# Altium PCB PCB1.PcbDoc (part 1 of 3)
Units mm, origin at the board's own origin, x right, y up, seen from the top; angles counter-clockwise.
Board outline 15.82 x 56.9 mm, 4 copper layers (Top Layer, Layer 1, Layer 2, Bottom Layer), stack 0.576 mm thick; 45 components, 31 nets, 148 pads, 202 vias.
Unrouted connection lines stored in the file: 3.
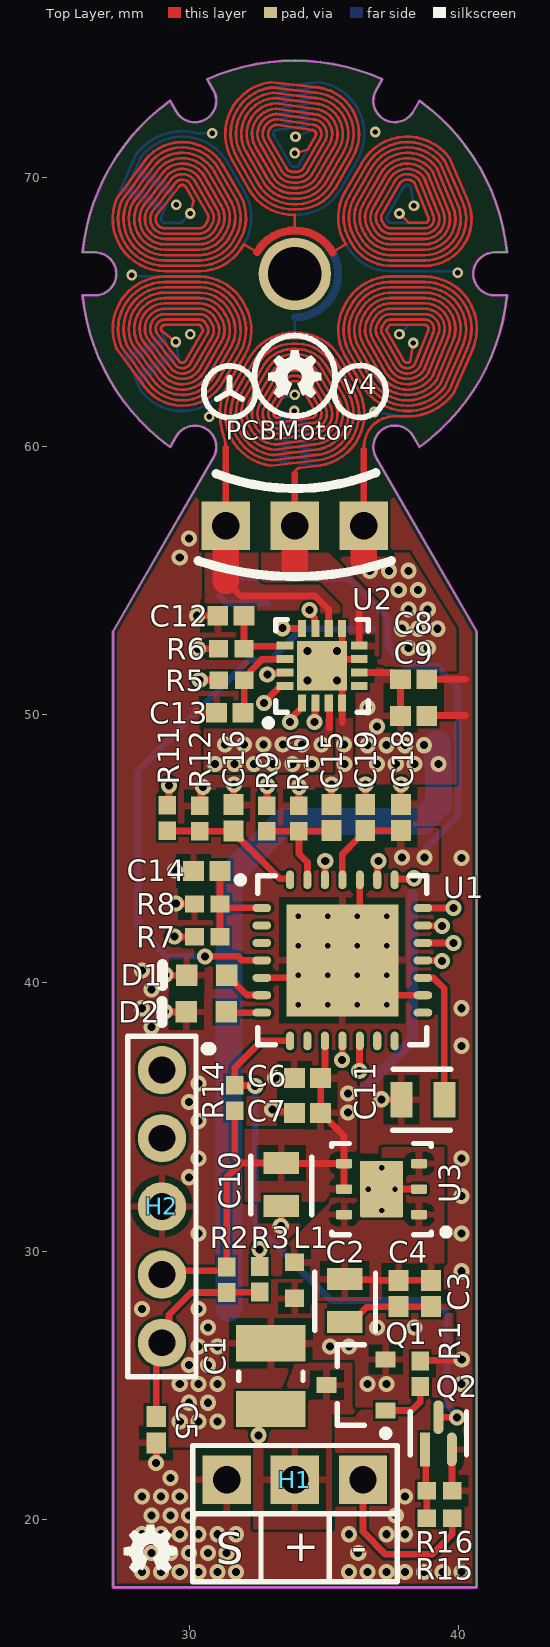
[diagram p0: Top Layer view]
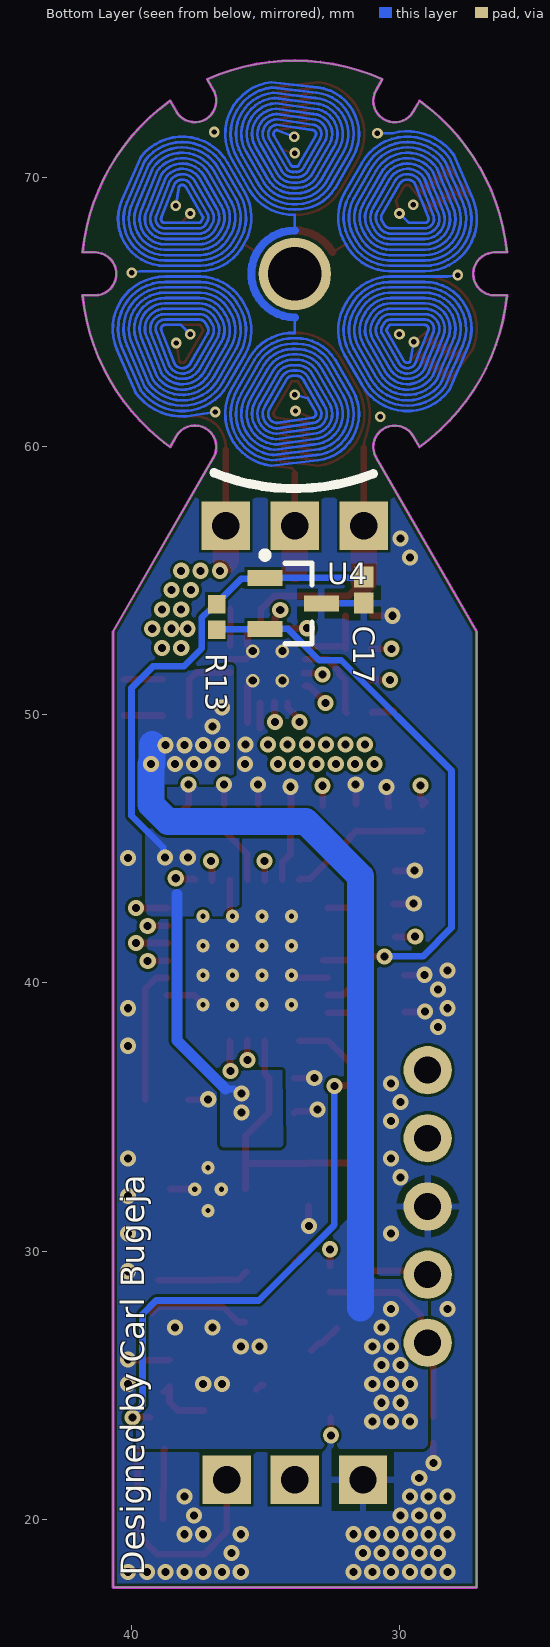
[diagram p1: Bottom Layer view, seen from below]
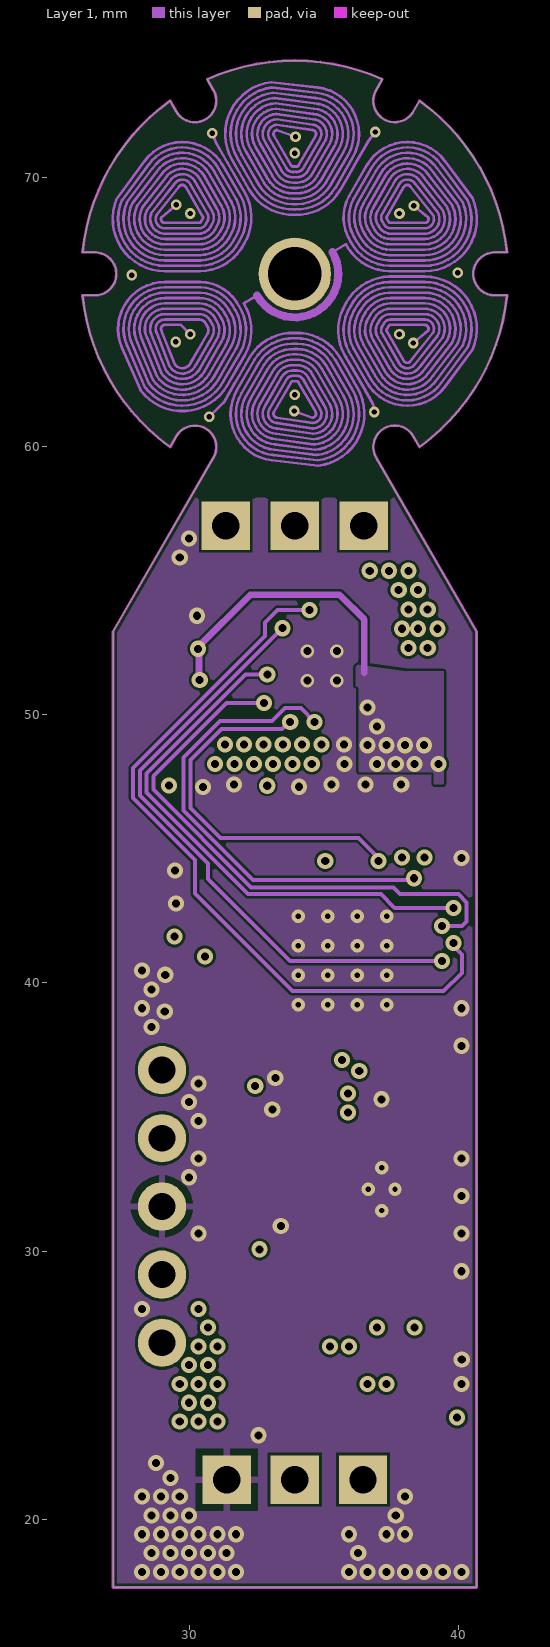
[diagram p2: Layer 1]
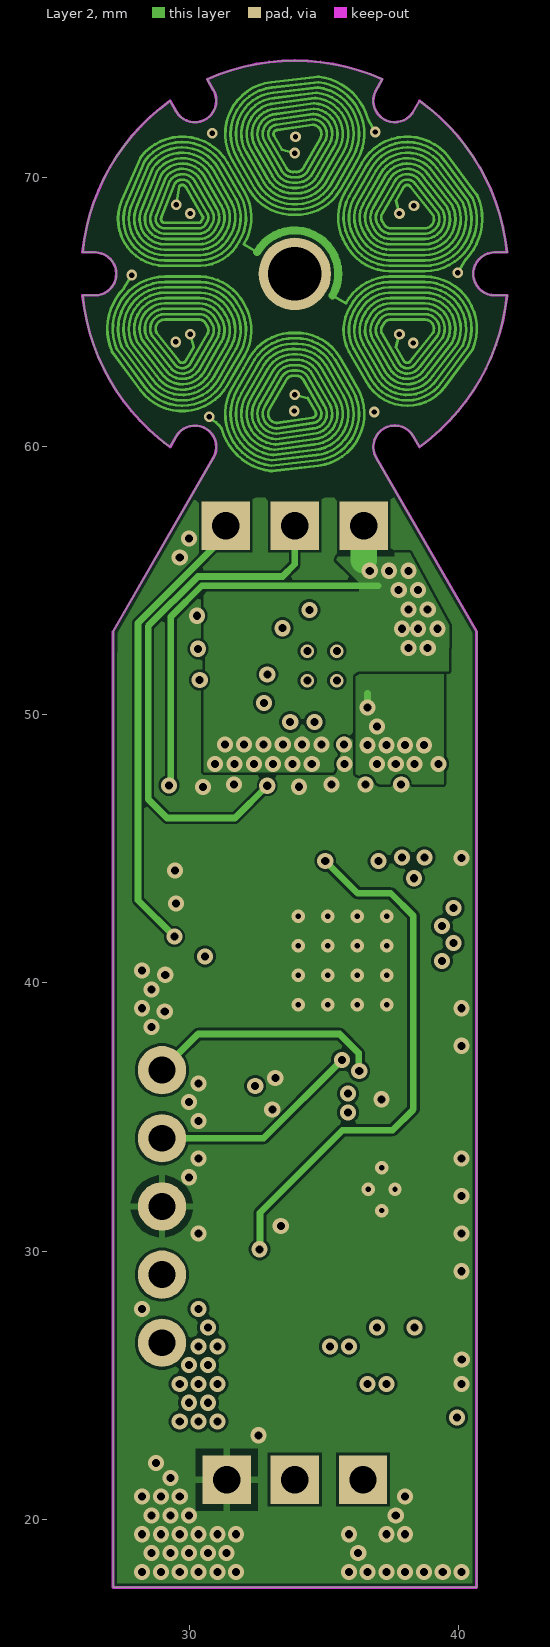
[diagram p3: Layer 2]

## Layer stack, top to bottom
Top Solder: solder mask 0.0102, Solder Resist, Dk 3.5
Top Layer: signal copper 0.0356
Dielectric 2: prepreg 0.145, PP-006, Dk 4.1
Layer 1: signal copper 0.035
Dielectric 1: dielectric 0.145, FR-4, Dk 4.8
Layer 2: signal copper 0.035
Dielectric 3: prepreg 0.145, PP-006, Dk 4.1
Bottom Layer: signal copper 0.0356
Bottom Solder: solder mask 0.0102, Solder Resist, Dk 3.5

## Board outline
27.136,17.475 27.136,53.09 30.877,59.569 ccw(c30.184,59.969) 30.984,59.969 ccw(c30.184,59.969) 29.491,60.369 29.261,59.972 cw(c33.909,66.421) 28.833,60.303 cw(c33.909,66.421) 26,65.621 26.459,65.621 ccw(c26.459,66.421) 27.259,66.421 ccw(c26.459,66.421) 26.459,67.221 26,67.221 cw(c33.909,66.421) 29.261,72.87 29.491,72.473 ccw(c30.184,72.873) 30.984,72.873 ccw(c30.184,72.873) 30.877,73.273 30.648,73.671 cw(c33.909,66.421) 37.17,73.671 36.922,73.241 ccw(c36.966,73.215) 36.917,73.229 ccw(c37.634,72.873) 38.282,72.403 ccw(c38.252,72.444) 38.296,72.419 38.557,72.87 cw(c33.909,66.421) 41.818,67.221 41.359,67.221 ccw(c41.359,66.421) 41.359,65.621 41.818,65.621 cw(c33.909,66.421) 38.985,60.303 cw(c33.909,66.421) 38.557,59.972 38.327,60.369 ccw(c37.634,59.969) 36.941,59.569 40.682,53.09 40.682,17.475

## Design rules (kind name [scope] priority, off if disabled: settings)
Clearance [All] p1: gap=0.1 ignorepadtopadclearanceinfootprint=FALSE
PolygonConnect PolygonConnect_1 [IsVia vs InNet('+3.3V')] p1: connectstyle=Direct reliefconductorwidth=0.254 reliefentries=4 polygonreliefangle="90 Angle" airgapwidth=0.254
PolygonConnect PolygonConnect_4 [IsVia vs InNet('VCC')] p2: connectstyle=Direct reliefconductorwidth=0.254 reliefentries=4 polygonreliefangle="90 Angle" airgapwidth=0.254
PolygonConnect PolygonConnect_3 [IsVia vs InNet('NetR7_2')] p3: connectstyle=Direct reliefconductorwidth=0.254 reliefentries=4 polygonreliefangle="90 Angle" airgapwidth=0.254
PolygonConnect PolygonConnect_2 [IsVia vs InNet('GND')] p4: connectstyle=Direct reliefconductorwidth=0.254 reliefentries=4 polygonreliefangle="90 Angle" airgapwidth=0.254
PolygonConnect [All] p5: connectstyle=Relief reliefconductorwidth=0.254 reliefentries=4 polygonreliefangle="90 Angle" airgapwidth=0.254
RoutingVias [All] p1: holewidth=0.2 width=0.4 viastyle="Through Hole" minholewidth=0.2 minwidth=0.4 maxholewidth=0.711 maxwidth=1.27
SolderMaskExpansion [All] p1: expansion=0 istentingtop=FALSE
Width [All] p1: maxlimit=5 minlimit=0.1 preferedwidth=0.25
30 further rules are at their usual default settings.

## Components (designator, comment, footprint, x,y, rotation, side; value= is the part's Value field where it differs from the comment)
C1 "47uF" TAYO-C1210-2_L 33.016,25.352 r90 top
C2 "10uF" FP-CL21B106KOQNNNE-MFG 35.775,28.164 r90 top
C3 "10nF" CAPC1005X56X25ML10T15 38.984,28.429 r90 top
C4 "100nF" CAPC1005X56X25ML10T15 37.77,28.429 r90 top
C5 "100nF" CAPC1005X56X25ML10T15 28.745,23.352 r90 top
C6 "100nF" CAPC1005X56X25ML10T15 34.381,36.453 r0 top
C7 "10nF" CAPC1005X56X25ML10T15 34.381,35.153 r0 top
C8 "10nF" CAPC1005X56X25ML10T15 38.336,51.316 r180 top
C9 "100nF" CAPC1005X56X25ML10T15 38.336,49.949 r180 top
C10 "10uF" FP-CL21B106KOQNNNE-MFG 33.399,32.494 r90 top
C11 "10uF" FP-CL21B106KOQNNNE-MFG 38.681,35.653 r0 top
C12 "10nF" CAPC1005X56X25ML10T15 31.528,53.683 r0 top
C13 "10nF" CAPC1005X56X25ML10T15 31.484,50.067 r0 top
C14 "10nF" CAPC1005X56X25ML10T15 30.627,44.173 r0 top
C15 "10nF" CAPC1005X56X25ML10T15 35.271,46.164 r270 top
C16 "10nF" CAPC1005X56X25ML10T15 31.627,46.155 r270 top
C17 "10nF" CAPC1005X56X25ML10T15 31.339,54.643 r90 bottom
C18 "10nF" CAPC1005X56X25ML10T15 37.861,46.164 r270 top
C19 "100nF" CAPC1005X56X25ML10T15 36.535,46.164 r270 top
D1 "HSMD-C190" AVAG-HSMX-C190_V 30.627,40.292 r180 top
D2 "HSMD-C190" AVAG-HSMX-C190_V 30.61,38.919 r180 top
H1 "H3P2.54" H3P2.54 49.235,21.096 r0 top
H2 "H5P2.54" H5P2.54* 28.959,36.753 r270 top
L1 "BLM18AG331SN1D" MURA-BLM18-RF-H4-CHIP-2_V 33.899,28.919 r90 top
Q1 "BSS308PE" INF-PG-SOT23_L 36.195,25.019 r180 top
Q2 "DMG1013T-7" FP-SOT523-IPC_B 39.259,23.219 r90 top
R1 "RC0402FR-07150RL" RESC1005X40X25ML05T10 38.581,25.438 r90 top
R2 "10k" RESC1005X40X25ML5T10 31.369,28.941 r90 top
R3 "150" RESC1005X40X25ML05T10 32.599,28.964 r270 top
R5 "10k" RESC1005X40X25ML5T10 31.549,51.285 r180 top
R6 "10k" RESC1005X40X25ML5T10 31.542,52.451 r180 top
R7 "18k" RESC1005X40X25ML05T10 30.643,41.714 r180 top
R8 "10k" RESC1005X40X25ML5T10 30.649,42.942 r0 top
R9 "18k" RESC1005X40X25ML05T10 32.87,46.128 r90 top
R10 "10k" RESC1005X40X25ML5T10 34.053,46.128 r270 top
R11 "18k" RESC1005X40X25ML05T10 29.149,46.15 r90 top
R12 "10k" RESC1005X40X25ML5T10 30.374,46.128 r270 top
R13 "10k" RESC1005X40X25ML5T10 36.825,53.639 r90 bottom
R14 "10k" RESC1005X40X25ML5T10 31.675,35.712 r90 top
R15 "150" RESC1005X40X25ML05T10 39.299,20.047 r180 top
R16 "10k" RESC1005X40X25ML5T10 39.299,21.082 r180 top
U1 "DSPIC33EP64MC202-E/MM" MCHP-QFN-S-MM28_N 35.681,40.842 r0 top
U2 "STSPIN230" QFN50P300X300X100_HS-17N 34.925,51.816 r90 top
U3 "LP38693SD-3.3/NOPB" NGG0006A_V 37.142,32.319 r180 top
U4 "DRV5015A3QDBZR" SOT95P237X95-3N 33.97,54.143 r180 bottom

## Footprints (in the part's own frame and the unit in brackets; to place one, negate y for a bottom-side part, rotate by r counter-clockwise, add the part's x,y. Pads: shape width x height; smd on the part's side, far side on the other; paste and mask are expansions set on the pad)
AVAG-HSMX-C190_V [mm] "SMD, 2-Leads, Body 1.6x0.8mm, Height 0.9mm"
  rect 0.8x0.8 smd: 1(-0.75,0) 2(0.75,0)
  silkscreen extent 1.65,-0.4 1.65,0.4, body extent -0.8,-0.4 0.8,0.4, height 0.9
CAPC1005X56X25ML10T15 [mm] "Chip Capacitor, 2-Leads, Body 1.00x0.50mm, IPC Low Density"
  rect 0.78x0.74 smd: 1(-0.49,0) 2(0.49,0)
  body extent -0.55,-0.3 0.55,0.3, height 0.56
FP-CL21B106KOQNNNE-MFG [mm]
  rect 0.825x1.325 smd paste+0 mask+0: 1(-0.8,0) 2(0.8,0)
  silkscreen extent -1.13,-1.14 1.05,1.12, body extent -1.31,-0.8 1.31,0.8, height 0.25
FP-SOT523-IPC_B [mm]
  rect 1.257x0.376 smd paste+0 mask+0: 1(-0.601,0.5)
  rrect100% 1.257x0.376 smd paste+0 mask+0: 2(-0.601,-0.5) 3(0.601,0)
  silkscreen extent -0.8,-1.05 0.8,1.05, body extent -1.48,-1.05 1.48,1.05, height 0.25
H3P2.54 [mm]
  rect 1.8x1.8 hole 1.02: 1(-17.866,0.397) 2(-15.326,0.397) 3(-12.786,0.397)
  silkscreen extent -19.13,-3.41 -11.51,1.67, body extent -19.13,-9.41 -11.51,0.95, height 2.57
H5P2.54* [mm]
  round 1.8 hole 1 paste-5: 1(0,0) 2(2.54,0) 3(5.08,0) 4(7.62,0) 5(10.16,0)
  silkscreen extent -1.26,-1.27 11.42,1.27
INF-PG-SOT23_L [mm] "SOT23, 3-Leads, Body 2.9x1.3mm, Pitch 0.95mm, IPC High Density"
  rect 0.75x0.6 smd: 1(-1.1,0.95) 2(-1.1,-0.95) 3(1.1,0)
  silkscreen extent -1.23,-1.5 0.7,1.92, body extent -0.7,-1.5 0.7,1.5, height 1.1
MCHP-QFN-S-MM28_N [mm] "QFN, 28-Leads, Body 6x6mm, Pitch 0.65mm, Thermal Pad 4.175x4.175mm, IPC Medium Density"
  oval 0.7x0.3 smd: 1(-3,1.95) 2(-3,1.3) 3(-3,0.65) 4(-3,0) 5(-3,-0.65) 6(-3,-1.3) 7(-3,-1.95) 15(3,-1.95) 16(3,-1.3) 17(3,-0.65) 18(3,0) 19(3,0.65) 20(3,1.3) 21(3,1.95)
  oval 0.3x0.7 smd: 8(-1.95,-3) 9(-1.3,-3) 10(-0.65,-3) 11(0,-3) 12(0.65,-3) 13(1.3,-3) 14(1.95,-3) 22(1.95,3) 23(1.3,3) 24(0.65,3) 25(0,3) 26(-0.65,3) 27(-1.3,3) 28(-1.95,3)
  rect 4.18x4.18 smd: 29(0,0)
  silkscreen extent -3.92,-3.15 3.15,3.15, body extent -3,-3 3,3, height 1
MURA-BLM18-RF-H4-CHIP-2_V [mm] "Chip Ferrite Bead, 2-Leads, Body 1.6x0.8mm, Height 0.95mm, Reflow"
  rect 0.65x0.7 smd: 1(-0.675,0) 2(0.675,0)
  body extent -0.8,-0.4 0.8,0.4, height 0.95
NGG0006A_V [mm] "SON, 6-Leads, Body 3x3 mm, Pitch 0.95mm, Full Paste, NSC Recommended"
  rrect29% 0.6x0.35 smd paste-0.175 mask+0.051: 1(-1.4,0.95) 2(-1.4,0) 3(-1.4,-0.95) 4(1.4,-0.95) 5(1.4,0) 6(1.4,0.95)
  rrect6% 1.6x2.1 smd paste-0.8 mask+0.051: 7(0,0)
  silkscreen extent -2.52,-1.7 1.85,1.72, body extent -1.55,-1.55 1.55,1.55, height 0.8
QFN50P300X300X100_HS-17N [mm] "QFN, 16-Leads, Body 3.00x3.00mm, Pitch 0.50mm, Thermal Pad 1.85x1.85mm, IPC Medium Density"
  rect 0.63x0.3 smd: 1(-1.385,0.75) 2(-1.385,0.25) 3(-1.385,-0.25) 4(-1.385,-0.75) 9(1.385,-0.75) 10(1.385,-0.25) 11(1.385,0.25) 12(1.385,0.75)
  rect 0.3x0.63 smd: 5(-0.75,-1.385) 6(-0.25,-1.385) 7(0.25,-1.385) 8(0.75,-1.385) 13(0.75,1.385) 14(0.25,1.385) 15(-0.25,1.385) 16(-0.75,1.385)
  rect 1.85x1.85 smd: 17(0,0)
  silkscreen extent -2.25,-1.72 1.72,2.12, body extent -1.58,-1.57 1.57,1.58, height 1
RESC1005X40X25ML05T10 [mm] "Chip Resistor, 2-Leads, Body 1.00x0.50mm, IPC Low Density"
  rect 0.7x0.65 smd: 1(-0.475,0) 2(0.475,0)
  body extent -0.53,-0.27 0.53,0.28, height 0.4
RESC1005X40X25ML5T10 [mm] "Chip Resistor, 2-Leads, Body 1.05x0.55mm, IPC Low Density"
  rect 0.7x0.65 smd: 1(-0.475,0) 2(0.475,0)
  body extent -0.53,-0.28 0.53,0.28, height 0.4
SOT95P237X95-3N [mm] "SOT23, 3-Leads, Body 2.92x2.37mm, Pitch 0.95mm, IPC Medium Density"
  rect 1.3x0.6 smd: 1(-1.05,0.95) 2(-1.05,-0.95) 3(1.05,0)
  silkscreen extent -1.18,-1.5 0.7,1.92, body extent -0.7,-1.52 0.7,1.52, height 0.95
TAYO-C1210-2_L [mm] "Chip Capacitor, 2-Leads, Body 3.50x2.70mm, IPC High Density"
  rect 1.35x2.6 smd: 1(-1.225,0) 2(1.225,0)
  silkscreen extent -0.15,-1.2 0.15,1.2, body extent -1.75,-1.35 1.75,1.35, height 2.7

## Part data
C1: library part CMP-2000-06559-1, "High Value Multilayer Ceramic Capacitor, 47 uF, 10 V, +/- 20%, -55 to 125 degC, 2-Pin - LMK325B7476KM-PRSMD (C1210), RoHS, Tape and Reel", Capacitance=47µF, Manufacturer="Taiyo Yuden", Operating Temperature=-55°C~125°C, Package / Case=1210(3225Metric), Package Description="2-Pin Surface Mount Device, Body 3.2 x 2.5 mm, Height 2.7 mm", Package Reference=C1210, Ratings=-, Standard Package=1, Temperature Coefficient=X7R, Tolerance=±20%, Voltage - Rated=10V, Applications=GeneralPurpose, Category=Capacitors, Datasheet URL=https://datasheet.ciiva.com/142/lmk325b7476mm-tr-ss-142765.pdf, Datasheet Version=10/2014, Family=CeramicCapacitors, Features=-, Height - Seated (Max)=-, Lead Spacing=-, Lead Style=-, Manufacturer URL=http://www.t-yuden.com/, Mounting Technology=SurfaceMount, Mounting Type=SurfaceMount,MLCC, Online Catalog=MSeries, Other Names=587-2783-6, Packaging=Digi-Reel®, Series=M, Size / Dimension="0.126\"Lx0.098\"W(3.20mmx2.50mm)", Thickness (Max)="0.106\"(2.70mm)"
C2 C10 C11: library part CMP-2000-06106-2, "CAP CER 10UF 16V X7R 0805 - CL21B106KOQNNNE", Manufacturer="Samsung Electro-Mechanics America, Inc", Manufacturer Part Number=CL21B106KOQNNNE, Temperature="-55°C to +125°C", Temperature Characteristic=X7R, Temperature Coefficient=15%, Temperature Range High=+125°C, Temperature Range Low=-55°C, Tolerance=10%, Voltage Rating=16V, Automotive=No, Capacitance=10uF, Category=Cap, ComponentLink2Description=Datasheet, ComponentLink2URL=http://www.samsungsem.com/servlet/FileDownload?path=productsearch&sname=CL21B106KOQNNNE.pdf&oname=CL21B106KOQNNNE.pdf, Device Class L1="Passive Components", Device Class L2=Capacitors, Device Class L3="Ceramic Capacitors", Digikey Description="CAP CER 10UF 16V X7R 0805", Height=1.4mm, Ipc Land Pattern Name=CAPC200125X125, Lead Free=Yes, Material=Ceramic, Octopart=https://octopart.com/cl21b106koqnnne-samsung-19832289, Package=CL21B106KOQNNNE, RoHS=TRUE
C3 C7 C8 C12 C13 C14 C15 C16 C17 C18: library part CMP-2008-02799-1, "0402YC103MAT2A", Manufacturer="AVX Interconnect / Elco", Part Number=0402YC103MAT2A
C4 C5 C9: library part CMP-2008-02800-1, "0402YC104KAT2A", Manufacturer="AVX Interconnect / Elco", Part Number=0402YC104KAT2A
C6 C19: library part CMP-2008-02800-1, "100nF / 0402YC104KAT2A", Manufacturer="AVX Interconnect / Elco", Part Number=0402YC104KAT2A
D1 D2: library part CMP-007-00012-1, "LED Uni-Color Orange, 52 mW, 20 mA, -40 to 85 degC, 2-Pin SMD, RoHS, Tape and Reel", Case/Package=0603, Colour=Orange, Forward Current=20mA, Forward Voltage=2.2V, Manufacturer=Avago, Max Operating Temperature=85°C, Min Operating Temperature=-40°C, Package Description="2-Pin Surface Mount Device, Body 1.6 x 0.8 mm, Height 0.9 mm", Package Quantity=4000, Package Reference=HSMX-C190, Power=52mW, Datasheet URL=http://docs.avagotech.com/docs/AV02-0551EN, Datasheet Version=Mar-12, Illumination Colour=Orange, Lens Style=Diffused, Luminous Intensity=8mcd, Manufacturer URL=http://www.avagotech.com/, Mounting Technology=SM, Nominal Vf=2.2V, Packaging=TapeandReel, Pins=2, RoHS Compliant=True, Viewing Angle=170degrees
L1: library part CMP-0686-00430-2, "Chip Ferrite Bead for General Use, 330 Ohm, 500 mA, -55 to 125 degC, 1.6 x 0.8 x 0.95 mm SMD, Tape and Reel", DC Resistance="0.30 Ohm Max.", Manufacturer=Murata, Operating Temperature Range="-55 to 125 degC", Rated Current="500 mA", ComponentLink1Description="Manufacturer URL", ComponentLink1URL=http://www.murata.com/, ComponentLink2Description=Datasheet, ComponentLink2URL=http://www.murata.com/products/catalog/pdf/c31e.pdf, ComponentLink3Description="Package Specification", ComponentLink3URL=http://www.murata.com/products/catalog/pdf/c31e.pdf, DatasheetVersion=08/2013, Impedance (at 100 MHz)="330 Ohm +/- 25%", Mounting Technology="Surface Mount", PackageDescription="2-Pin Chip, Body 1.6 x 0.8 mm", PackageReference=BLM18_H950-2, Packing="Tape and Reel", PartNumber=BLM18AG331SN1D
Q1: library part CMP-1099-00030-1, "P-Channel OptiMOS P3 Small-Signal-Transistor, -30 V VDS, -2 A ID, -55 to 150 degC, PG-SOT23, Reel, Green", Manufacturer=Infineon, ComponentLink1Description="Manufacturer URL", ComponentLink1URL=http://www.infineon.com/, ComponentLink2Description=Datasheet, ComponentLink2URL=http://www.infineon.com/dgdl/BSS308PE_Rev23_.pdf?folderId=db3a304314dca38901154a72e3951a65&fileId=db3a304330f686060131099c80400073, ComponentLink3Description="Package Specification", ComponentLink3URL=http://www.infineon.com/dgdl/SOT23-Package_Overview.pdf?folderId=db3a30431936bc4b0119532290053c66&fileId=db3a30431936bc4b0119533468123c85, DatasheetVersion="Rev. 2.03", Green=TRUE, Halogen-free=TRUE, ID (max)="-2Â A", IDpuls (max)="-8Â A", Mounting Technology="Surface Mount", PackageDescription="3-Pin Small Outline Transistor Package, 2.9 x 1.3 mm Body, 0.95 mm Pitch", PackageReference=PG-SOT23, PackageVersion=Apr-08, Packing=Reel, PartNumber=BSS308PE, Pto t (max)="0.5Â W", QG="-5Â nC", RDS (on) (max)="80Â mOhm", RDS (on) (max) (@4.5V)="130Â mOhm", Rth="250Â K/W", VDS (max)="-30Â V", VGS(th) (max)="-1Â V", VGS(th) (min)="-2Â V"
Q2: library part CMP-12801-000011-2, "MOSFET P-CH 20V 0.46A SOT-523", Case/Package=SOT-523, Continuous Drain Current (ID)=460mA, Drain to Source Breakdown Voltage=-20V, Drain to Source Resistance=1R, Drain to Source Voltage (Vdss)=20V, Gate to Source Voltage (Vgs)=6V, Input Capacitance=59.76pF, Max Operating Temperature=150°C, Max Power Dissipation=270mW, Min Operating Temperature=-55°C, On-State Resistance=700mR, Package Quantity=1, Threshold Voltage=-1V, Contact Plating=Tin, Element Configuration=Single, Fall Time=20.7ns, Height=0.8mm, Lead Free="Lead Free", Length=1.7mm, Mount="Surface Mount", Number of Channels=1, Number of Elements=1, Number of Pins=3, Packaging="Tape and Reel", Power Dissipation=270mW, Radiation Hardening=No, Rds On Max=700mR, REACH SVHC="No SVHC", Rise Time=8.1ns, Turn-Off Delay Time=28.4ns, Turn-On Delay Time=5.1ns, Weight=7.1E-05oz, Width=0.85mm
R1: library part CMP-2002-07401-1, Manufacturer="Yageo / Phycomp", Part Number=RC0402FR-07150RL
R2 R5 R6 R8 R10 R12 R13 R14 R16: library part CMP-2002-07915-2, "Chip Resistor, 10 KOhm, +/- 5%, 0.063 W, -55 to 155 degC, 0402 (1005 Metric), RoHS, Tape and Reel - RC0402JR-0710KL", Case Code (Imperial)=0402, Case Code (Metric)=1005, Max Operating Temperature="155 degC", Min Operating Temperature="-55 degC", Package Quantity=10000, Power Rating="63 mW", Resistance="10 kohm", Tolerance=5%, Voltage Rating="50 V", Case\Package=0402, ComponentLink1Description="Manufacturer URL", ComponentLink1URL=http://www.yageo.com/, ComponentLink2Description=Datasheet, ComponentLink2URL=http://www.yageo.com/documents/recent/PYu-RC_Group_51_RoHS_L_04.pdf, DatasheetVersion="Rev. 4, 02/2016", Height="0.35 mm", Length="1 mm", Mount="Surface Mount", Mounting Technology="Surface Mount", PackageDescription="2-Pin Surface Mount Device, Body 1 x 0.5 mm", PackageReference=0402, Packaging="Tape and Reel", Pins=2, REACH SVHC="No SVHC", RoHSCompliant=true, Voltage Rating (DC)="50 V", Width="0.5 mm"
R3 R15: library part CMP-2002-07401-1, "RC0402FR-07150RL", Manufacturer="Yageo / Phycomp", Part Number=RC0402FR-07150RL
R7 R9 R11: library part CMP-2002-07934-1, "RC0402JR-0718KL", Manufacturer="Yageo / Phycomp", Part Number=RC0402JR-0718KL
U1: library part CMP-0375-00039-1, "16-Bit Microcontroller and Digital Signal Controller with High-Speed PWM, Op Amps and Advanced Analog, 70 MIPS, 21 I/O, GPIO, -40 to 125 degC, 28-pin QFN (MM28), Tube", Manufacturer=Microchip, ComponentLink1Description="Manufacturer URL", ComponentLink1URL=http://www.microchip.com, ComponentLink2Description=Datasheet, ComponentLink2URL=http://ww1.microchip.com/downloads/en/DeviceDoc/70657F.pdf, ComponentLink3Description="Package Specification", ComponentLink3URL=http://www.microchip.com/stellent/groups/techpub_sg/documents/packagingspec/en012702.pdf, ComponentLink4Description="Product URL", ComponentLink4URL=http://www.microchip.com/dsPIC33EP64MC202, DatasheetVersion="Rev. F", Mounting Technology="Surface Mount", PackageDescription="28-Lead Plastic Quad Flat, 6 x 6 mm Body, 0.65 mm Pitch", PackageReference=QFN-MM28, PackageVersion=C04-124C, PartNumber=DSPIC33EP64MC202-E/MM
U3: library part CMP-0062-01530-4, "500mA Low Dropout CMOS Linear Regulators Stable with Ceramic Output Capacitors, 6-pin LLP, Pb-Free, 1000 Reel", Manufacturer="Texas Instruments", PackageTopMarking=ZXYTT*L130B, PowerWise=Y, ComponentLink1Description="Datasheet URL", ComponentLink1URL=http://www.ti.com/general/docs/lit/getliterature.tsp?genericPartNumber=LP38693&fileType=pdf, CompType="LDO IC", High-Reliability=Y, PackageDescription="LLP, Plastic, Dual, 3 x 3 x 0.8mm Body, 6 Lead, 0.95mm Pitch, No Pullback", PackageReference=NGG0006A, PartNumber=LP38693SD-3.3/NOPB, PinCount=6, RoHS=Y

## Free pads (board coordinates)
  rect 1.8x1.8 hole 1.02: ""(31.339,57.031) ""(33.909,57.031) ""(36.479,57.031)
  round 2.7 hole 2: ""(33.909,66.421)

## Via types
v1: diameter 0.6, hole 0.3, Top Layer to Bottom Layer, tented both sides, 160 vias
v2: diameter 0.5, hole 0.2, Top Layer to Bottom Layer, tented bottom, 20 vias
v3: diameter 0.4, hole 0.2, Top Layer to Bottom Layer, tented both sides, 18 vias
v4: diameter 0.5, hole 0.3, Top Layer to Bottom Layer, tented bottom, 4 vias

## Nets (pads, with @x,y where several pads share a name; then routed paths per layer and width w, separated by ;. In a path a pad name is that pad's centre, name@x,y a point inside that pad or via, vN(x,y) a via of type N, cw(c..) or ccw(c..) an arc to the next point about the centre after c; other vN are vias at no path point)
+3.3V: C6.2 C7.2 C10.2 C17.2 C18.2 C19.2 H2.4 R2.2 R13.2 R14.1 U1.10 U1.25 U3.4 U3.5 U4.1 | length 48.7
  Top Layer w0.25: H2.4@28.959,29.133 29.101,29.275 31.227,29.275 R2.2@31.369,29.416 31.369,32.744 31.919,33.294 ; R14.1@31.675,35.237 31.675,33.537 31.919,33.294 ; U1.10@35.031,37.842 35.021,37.832 35.031,37.822 35.031,36.613 C6.2@34.871,36.453 C7.2@34.871,35.153 34.891,35.153 35.742,34.301 U3.4@35.742,33.269 ; U1.25@35.681,43.842 35.681,44.81 36.28,45.409 36.29,45.409 36.535,45.654 C19.2@36.535,45.674 C18.2@37.861,45.674 C18.2@37.978,45.791 ; U3.5@35.742,32.319 U3.4@35.742,33.269 ; 31.919,33.294 C10.2@33.399,33.294 33.424,33.269 U3.4@35.742,33.269
  Bottom Layer w0.25: C17.2@31.339,55.133 31.379,55.093 U4.1@35.02,55.093 35.048,55.066 35.899,55.066 36.825,54.139 36.825,54.089 37.025,53.889 37.099,53.889 37.375,53.612 37.375,52.467 38.046,51.795 39.192,51.795 39.994,50.994 39.994,46.23 38.811,45.047 38.811,44.748 v1(38.744,44.681) ; v1(35.892,35.875) 35.987,35.875 36.162,36.051 36.49,36.051
  Bottom Layer w0.4: 36.49,36.051 38.296,37.856 38.296,43.304
  other v1: 35.892,35.175 37.896,44.681
GND: C1.1 C2.1 C3.1 C4.1 C5.1 C6.1 C7.1 C8.1 C9.1 C10.1 C11.1 C12.1 C13.1 C14.1 C15.1 C16.1 C17.1 C18.1 C19.1 D1.2 D2.2 H1.1 H2.3 Q2.2 R1.2 R8.1 R10.1 R12.1 R16.1 U1.5 U1.16 U1.24 U1.29 U2.4 U2.7 U2.9 U2.17 U3.2 U3.7 U4.3 | length 34.2
  Top Layer w0.1: v4(35.475,51.266) U2.17@35.675,51.066
  Top Layer w0.25: v1@28.755,22.121 C5.1@28.755,22.854 ; v1@29.076,38.919 D2.2@29.809,38.919 ; v1@29.094,40.291 D1.2@29.827,40.291 ; v1@29.454,44.173 C14.1@30.187,44.173 ; v1@29.49,42.942 R8.1@30.224,42.942 ; 30.22,50.132 30.253,50.1 31.012,50.1 C13.1@31.033,50.078 ; v1(30.27,53.683) C12.1@31.028,53.683 ; R12.1@30.396,46.575 30.433,46.612 30.433,47.24 v1(30.492,47.299) ; C16.1@31.627,46.655 v1@31.627,47.388 ; v1@32.573,23.157 C1.1@32.573,23.793 ; U1.5@32.681,40.192 33.931,40.192 v2(34.031,40.292) ; v1(33.07,35.277) 33.133,35.215 33.866,35.215 C7.1@33.928,35.153 ; v1@33.195,36.453 C6.1@33.928,36.453 ; v1@33.399,30.96 C10.1@33.399,31.694 ; R10.1@34.053,46.565 v1@34.053,47.299 ; C15.1@35.271,46.654 v1@35.271,47.387 ; 35.675,49.697 U2.4@35.675,50.431 U2.17@35.675,51.066 ; U2.9@35.675,53.201 35.675,52.566 v4(35.475,52.366) 35.475,52.316 35.725,52.066 U2.7@36.31,52.066 ; C2.1@35.775,27.364 36.025,27.364 36.577,27.916 36.882,27.916 36.905,27.939 C4.1@37.77,27.939 C3.1@38.984,27.939 C3.1@39.229,27.694 ; v2(36.231,42.492) 36.331,42.592 U1.24@36.331,43.842 ; C19.1@36.535,46.654 v1@36.535,47.387 ; v1@37.147,35.653 C11.1@37.881,35.653 ; v2(37.331,39.192) 37.331,39.227 37.646,39.542 U1.16@38.681,39.542 ; v2(37.642,32.319) U3.2@38.542,32.319 ; v1@37.861,47.387 C18.1@37.861,46.654 C18.1@38.074,46.441 ; R1.2@38.581,25.962 38.605,25.938 40.105,25.938 v1(40.13,25.963) ; C9.1@38.826,49.949 38.843,49.966 40.27,49.966 ; C8.1@38.826,51.316 40.27,51.316 ; Q2.2@39.759,22.618 39.766,22.611 39.766,21.089 R16.1@39.774,21.082
  Bottom Layer w0.25: C17.1@31.094,54.418 C17.1@31.339,54.173 ; C17.1@31.339,54.153 31.349,54.143 U4.3@32.92,54.143
  other v1: 28.221,18.058 28.921,18.058 29.621,18.058 30.321,18.058 31.021,18.058 31.721,18.058 35.921,18.058 36.621,18.058 37.321,18.058 38.021,18.058 38.721,18.058 39.421,18.058 40.121,18.058 28.571,18.758 29.271,18.758 29.971,18.758 30.671,18.758 31.371,18.758 36.271,18.758 28.221,19.458 28.921,19.458 29.621,19.458 30.321,19.458 31.021,19.458 31.721,19.458 35.921,19.458 37.321,19.458 38.021,19.458 28.571,20.158 29.271,20.158 29.971,20.158 37.671,20.158 28.221,20.858 28.921,20.858 29.621,20.858 38.021,20.858 29.271,21.558 28.742,22.108 32.56,23.145 40.121,25.058 28.221,27.858 40.121,29.258 30.321,30.658 40.121,30.658 33.387,30.948 40.121,32.058 29.971,32.758 30.321,33.458 40.121,33.458 30.321,34.858 29.971,35.558 37.135,35.665 30.321,36.258 33.182,36.465 40.121,37.658 28.571,38.358 29.063,38.932 28.221,39.058 40.121,39.058 28.571,39.758 29.081,40.304 28.221,40.458 29.478,42.954 29.441,44.186 40.121,44.658 34.065,47.311 31.639,47.401 35.283,47.4 36.547,47.4 37.874,47.4 35.76,48.158 35.748,48.878 29.621,55.858 29.971,56.558
  other v2: 37.142,31.519 36.642,32.319 37.142,33.119 34.031,39.192 35.131,39.192 36.231,39.192 35.131,40.292 36.231,40.292 37.331,40.292 34.031,41.392 35.131,41.392 36.231,41.392 37.331,41.392 34.031,42.492 35.131,42.492 37.331,42.492
  other v4: 34.375,51.266 34.375,52.366
NetC2_2: C2.2 C3.2 C4.2 L1.2 U3.1 U3.3 U3.6 | length 3.7
  Top Layer w0.25: L1.2@33.674,29.819 33.674,29.794 33.874,29.594 L1.2@33.899,29.594 ; C2.2@35.724,29.229 36.012,28.941 36.882,28.941 36.905,28.919 C4.2@37.77,28.919 C3.2@38.984,28.919
NetC5_2: C5.2 H2.5 R2.1 R3.2 | length 7.7
  Top Layer w0.25: C5.2@28.745,23.842 28.745,26.378 29.22,26.853 29.22,27.635 30.052,28.466 R2.1@31.369,28.466 31.38,28.478 32.588,28.478 R3.2@32.599,28.489
NetC11_2: C11.2 U1.17 | length 5.1
  Top Layer w0.25: U1.17@38.681,40.192 38.691,40.182 39.084,40.182 39.481,39.785 C11.2@39.481,35.653
NetC12_2: C12.2 R6.1 U2.13 | length 2.8
  Top Layer w0.25: C12.2@32.018,53.683 32.017,53.682 R6.1@32.017,52.451 32.107,52.541 33.515,52.541 U2.13@33.54,52.566
NetC13_2: C13.2 R5.1 U2.14 | length 3.1
  Top Layer w0.25: C13.2@31.974,50.067 32.024,50.117 R5.1@32.024,51.285 32.049,51.285 32.249,51.485 32.249,51.607 32.708,52.066 U2.14@33.54,52.066
NetC14_2: C14.2 R7.1 R8.2 U1.1 | length 4.1
  Top Layer w0.25: C14.2@31.117,44.173 C14.2@31.118,44.172 ; R7.1@31.118,41.714 C14.2@31.118,44.172 ; R8.2@31.124,42.942 31.264,42.801 32.671,42.801 U1.1@32.681,42.792 ; C14.2@31.168,44.122 C14.2@31.118,44.172
NetC15_2: C15.2 R9.1 R10.2 U1.27 | length 4.4
  Top Layer w0.25: R9.1@32.87,45.653 R10.2@34.053,45.653 ; U1.27@34.381,43.842 34.381,44.495 34.065,44.81 34.065,45.64 R10.2@34.053,45.653 ; C15.2@35.271,45.674 35.25,45.653 R10.2@34.053,45.653
NetC16_2: C16.2 R11.1 R12.2 U1.28 | length 5.4
  Top Layer w0.25: R11.1@29.149,45.675 29.16,45.664 30.363,45.664 R12.2@30.374,45.653 31.615,45.653 C16.2@31.627,45.665 31.872,45.42 31.872,45.361 33.352,43.88 33.708,43.88 33.731,43.857 U1.28@33.731,43.842
NetD1_1: D1.1 U1.6 | length 1.6
  Top Layer w0.25: D1.1@31.377,40.291 32.117,39.551 32.671,39.551 U1.6@32.681,39.542
NetD2_1: D2.1 U1.7 | length 1.3
  Top Layer w0.25: D2.1@31.359,38.919 31.387,38.892 U1.7@32.681,38.892
NetH1_2: H1.2 Q1.3 | length 0.3
  Top Layer w0.25: Q1.3@35.095,25.019 35.17,25.019 Q1.3@35.345,24.844
NetH1_3: H1.3 R15.1 | length 6.5
  Top Layer w0.25: H1.3@36.449,21.493 36.449,19.556 37.295,18.71 39.024,18.71 39.774,19.46 R15.1@39.774,20.047
NetH2_1: H2.1 U1.12 | length 10
  Top Layer w0.25: v1(36.31,36.719) 36.321,36.73 36.321,37.832 U1.12@36.331,37.842
  Layer 2 w0.25: H2.1@28.959,36.753 30.307,38.1 35.581,38.1 36.287,37.394 36.287,36.742 v1(36.31,36.719)
NetH2_2: H2.2 U1.11 | length 8.7
  Top Layer w0.25: v1@35.681,37.146 U1.11@35.681,37.842 U1.11@35.681,37.879
  Layer 2 w0.25: H2.2@28.959,34.213 32.748,34.213 v1(35.668,37.133)
NetQ1_1: Q1.1 R1.1 | length 2.3
  Top Layer w0.25: Q1.1@37.295,24.069 38.262,24.069 38.581,24.388 R1.1@38.581,24.963 R1.1@38.781,24.763
NetQ2_1: Q2.1 R15.2 R16.2 | length 2.6
  Top Layer w0.25: Q2.1@38.759,22.618 38.791,22.586 38.791,21.114 R16.2@38.824,21.082 R15.2@38.824,20.047
NetQ2_3: Q2.3 R14.2 U1.8 | length 22.2
  Top Layer w0.25: R14.2@31.675,36.187 31.675,36.854 32.663,37.842 U1.8@33.731,37.842 ; R14.2@31.688,36.176 v1@32.421,36.176 ; Q2.3@39.308,23.82 v1@39.944,23.82
  Bottom Layer w0.25: v1(32.434,36.164) 32.434,30.985 35.254,28.164 39.074,28.164 39.584,27.654 39.584,24.274 39.956,23.902 v1(39.956,23.807)
NetR3_1: R3.1 U1.26 | length 21.4
  Top Layer w0.25: R3.1@32.599,29.439 v1@32.6,30.076 ; U1.26@35.031,43.804 U1.26@35.031,43.842 v1@35.031,44.538
  Layer 2 w0.25: v1(32.6,30.076) 32.612,30.088 32.612,31.437 35.688,34.513 37.548,34.513 38.327,35.292 38.327,42.501 37.486,43.342 36.252,43.342 v1(35.043,44.55)